# Altium PCB board2.PcbDoc
Units mm, origin at the board's own origin, x right, y up, seen from the top; angles counter-clockwise.
Board outline 120 x 70 mm, 2 copper layers (Top Layer, Bottom Layer); 12 components, 22 nets, 119 pads, 0 vias.
Unrouted connection lines stored in the file: 1.
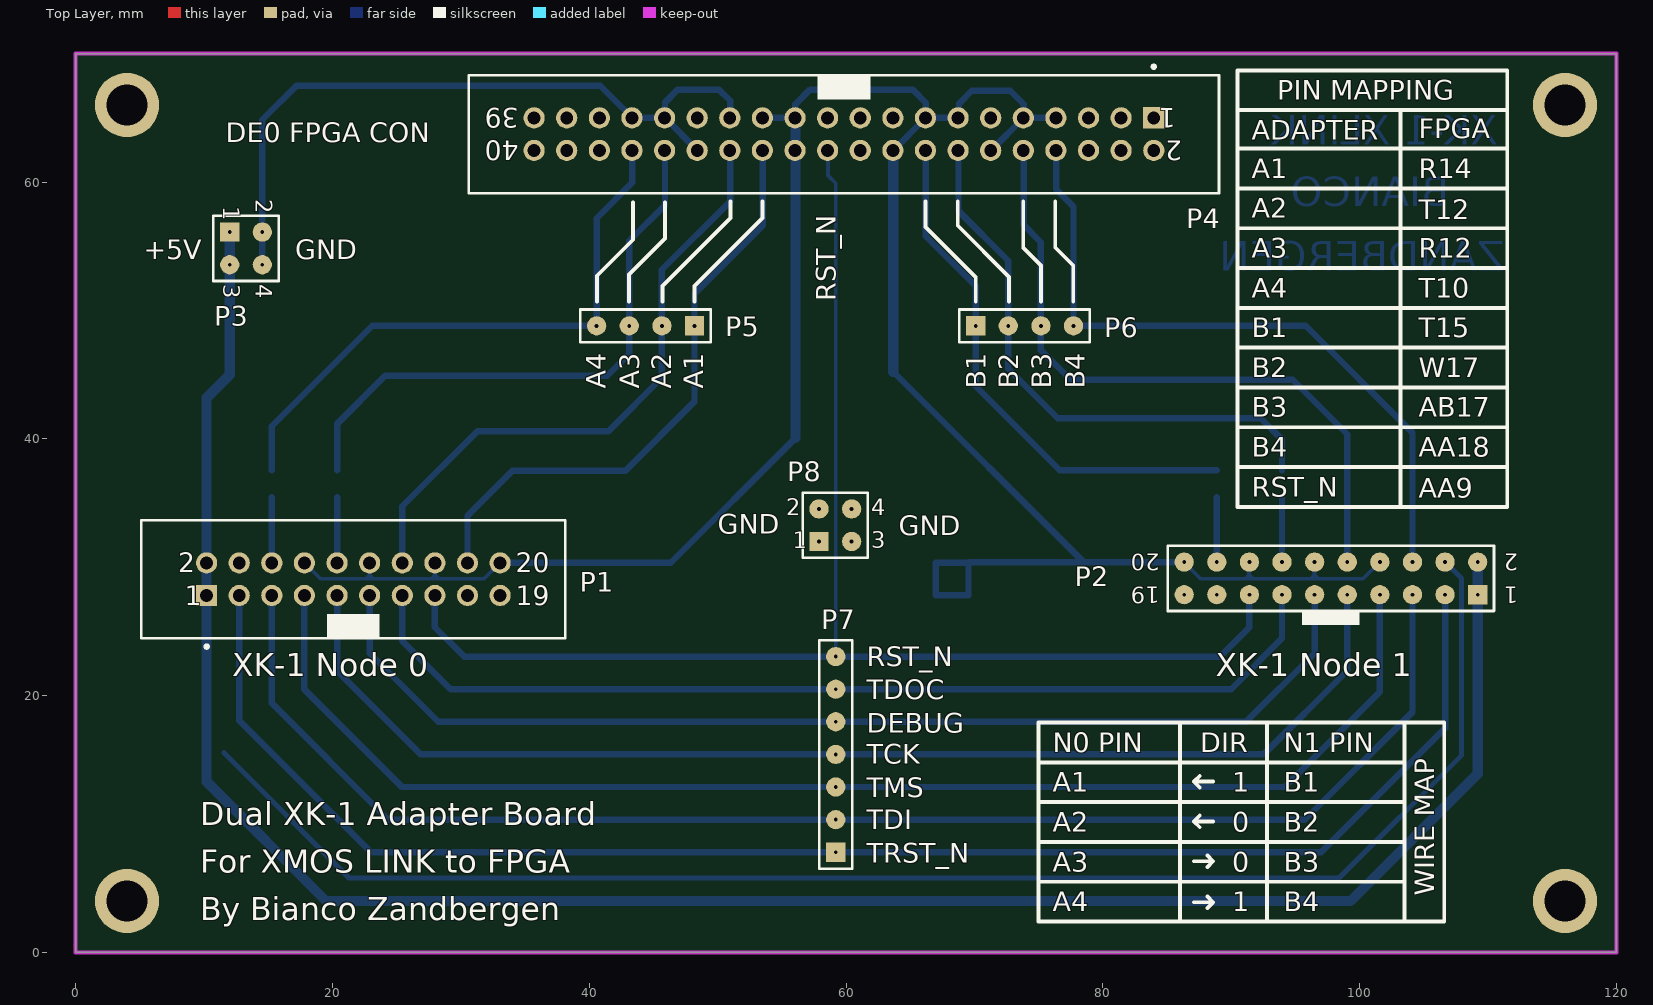
[diagram p0: Top Layer view]
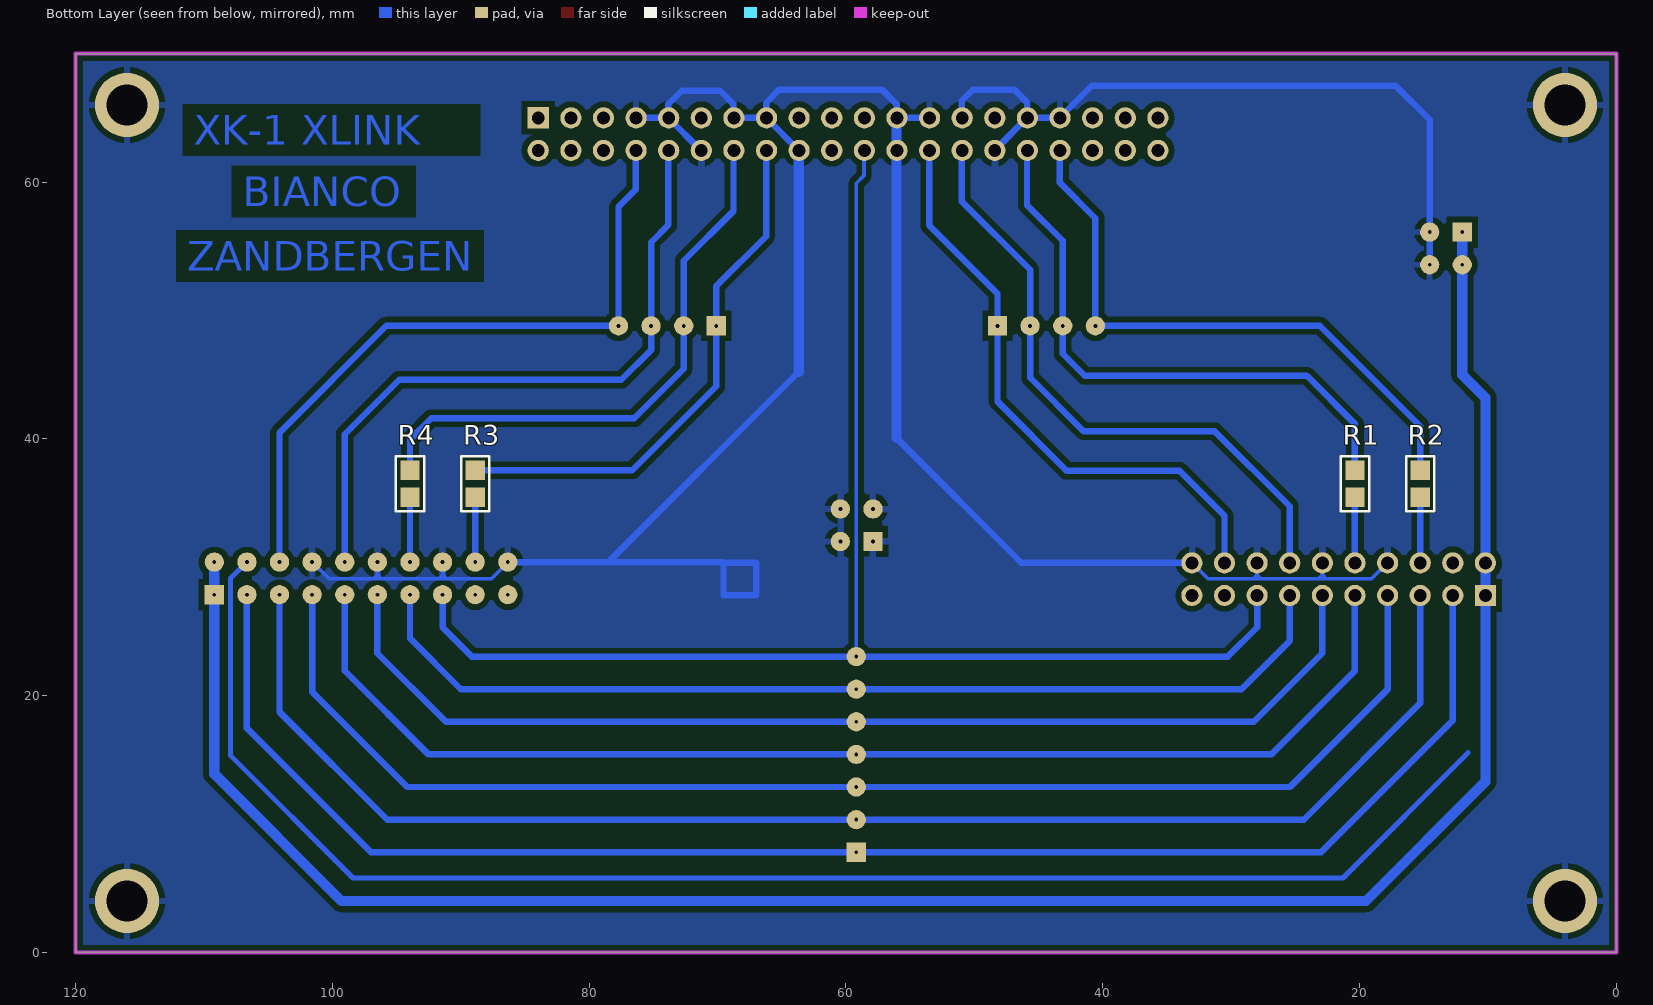
[diagram p1: Bottom Layer view, seen from below]
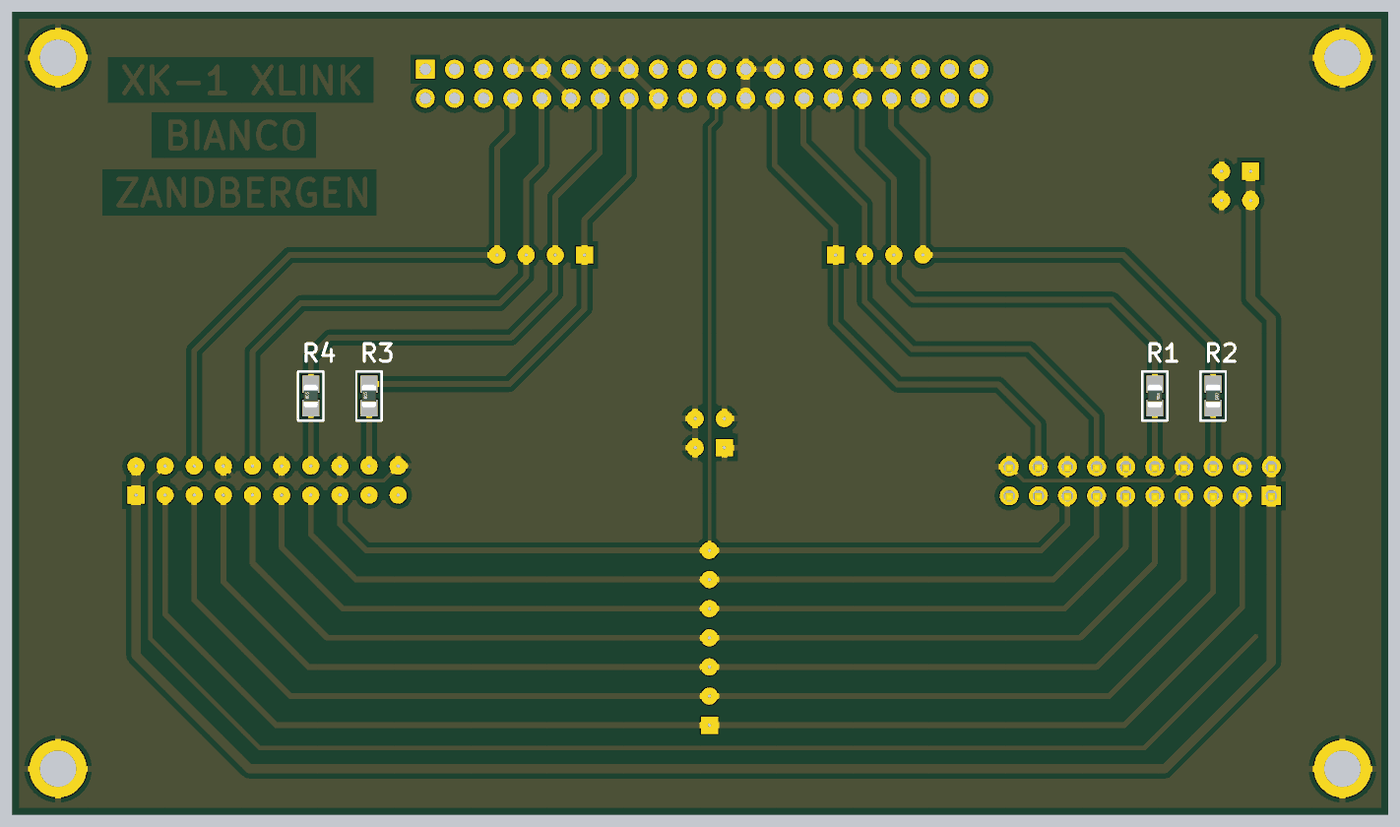
[diagram p2: 3D render of the assembled board from below, using the file's embedded part models]

## Layer stack, top to bottom
Top Layer: signal copper 0.0356
Dielectric: dielectric 0.32, FR-4, Dk 4.8
Bottom Layer: signal copper 0.0356

## Board outline
0,0 120,0 120,70 0,70

## Design rules (kind name [scope] priority, off if disabled: settings)
Clearance PolyClearance [All vs InPolygon] p1: gap=0.45
Clearance [All] p2: gap=0.3
PolygonConnect PolygonConnect_1 [All vs IsNamedPolygon('GND')] p1: connectstyle=Relief reliefconductorwidth=0.5 reliefentries=4 polygonreliefangle="90 Angle"
PolygonConnect [All] p2: connectstyle=Relief reliefconductorwidth=0.254 reliefentries=4 polygonreliefangle="90 Angle"
RoomDefinition board1 [InComponentClass('board1')] p1 off: confinementstyle=ConfineIn formatcopy=TRUE lockcomponents=FALSE outline 121.158,1.524 180.086,1.524 180.086,59.817 121.158,59.817
RoutingVias [All] p1: holewidth=0.8 width=1.6 viastyle="Through Hole" minholewidth=0.711 minwidth=1.27 maxholewidth=0.711 maxwidth=1.27
SilkscreenOverComponentPads [All] p1: minsilkscreentomaskgap=0.254
SolderMaskExpansion [All] p1: expansion=0.102
Width [All] p1: maxlimit=0.8 minlimit=0.3 preferedwidth=0.5 toplayer_maxwidth=0.5 minimp=50.000000 maximp=50.000000 favimp=50.000000
27 further rules are at their usual default settings.

## Components (designator, comment, footprint, x,y, rotation, side; value= is the part's Value field where it differs from the comment)
P1 "Header 10X2" IDC2.54-V20D 21.63,29.07 r0 top
P2 "Header 10X2" HDR2X10_MIRROR 109.2,30.4 r180 top
P3 "Header 2X2" HDR2X2 12,56.1 r270 top
P4 "Header 20X2" IDC2.54-V40D 59.84,63.73 r180 top
P5 "Header 4" HDR1X4 48.2,48.8 r180 top
P6 "Header 4" HDR1X4 70.1,48.8 r0 top
P7 "Header 7" HDR1X7 59.2,7.8 r90 top
P8 "Header 2X2" HDR2X2 57.9,32 r0 top
R1 "Res1" 2012[0805]_RES 20.36,36.5 r270 bottom
R2 "Res1" 2012[0805]_RES 15.28,36.5 r270 bottom
R3 "Res1" 2012[0805]_RES 88.88,36.5 r90 bottom
R4 "Res1" 2012[0805]_RES 93.96,36.5 r90 bottom

## Footprints (in the part's own frame and the unit in brackets; to place one, negate y for a bottom-side part, rotate by r counter-clockwise, add the part's x,y. Pads: shape width x height; smd on the part's side, far side on the other; paste and mask are expansions set on the pad)
2012[0805]_RES [mm] "Chip Resistor / Capacitor; Body 2.0 x 1.3 mm (LxW typ) Handsoldering optimized"
  rect 1.5x1.5 smd: 1(-1.05,0) 2(1.05,0)
  silkscreen extent -2.15,-1.1 2.15,1.1, body extent -1,-0.63 1,0.62, height 0.78
HDR1X4 [mm] "Connector; Header; 4 Position"
  rect 1.5x1.5 hole 0.3: 1(0,0)
  round 1.5 hole 0.3: 2(2.54,0) 3(5.08,0) 4(7.62,0)
  silkscreen extent -1.27,-1.27 8.89,1.27
HDR1X7 [mm] "Connector; Header; 7 Position"
  rect 1.5x1.5 hole 0.3: 1(0,0)
  round 1.5 hole 0.3: 2(2.54,0) 3(5.08,0) 4(7.62,0) 5(10.16,0) 6(12.7,0) 7(15.24,0)
  silkscreen extent -1.27,-1.27 16.51,1.27
HDR2X2 [mm] "Connector; Header; 2x2 Position"
  rect 1.5x1.5 hole 0.3: 1(0,0)
  round 1.5 hole 0.3: 2(0,2.54) 3(2.54,0) 4(2.54,2.54)
  silkscreen extent -1.27,-1.27 3.81,3.81
HDR2X10_MIRROR [mm]
  rect 1.5x1.5 hole 0.3: 1(0,2.54)
  round 1.5 hole 0.3: 2(0,0) 3(2.54,2.54) 4(2.54,0) 5(5.08,2.54) 6(5.08,0) 7(7.62,2.54) 8(7.62,0) 9(10.16,2.54) 10(10.16,0) 11(12.7,2.54) 12(12.7,0) 13(15.24,2.54) 14(15.24,0) 15(17.78,2.54) 16(17.78,0) 17(20.32,2.54) 18(20.32,0) 19(22.86,2.54) 20(22.86,0)
  silkscreen extent -1.27,-1.27 24.13,3.81
IDC2.54-V20D [mm] "Connector; IDC, Low Profile Male Header, Thru-Hole; 20 Position; Vertical; Pitch 2.54 mm; Body 33.02 x 9.2 x 9.45 mm (LxWxH)"
  rect 1.65x1.65 hole 1: 1(-11.43,-1.27)
  round 1.65 hole 1: 2(-11.43,1.27) 3(-8.89,-1.27) 4(-8.89,1.27) 5(-6.35,-1.27) 6(-6.35,1.27) 7(-3.81,-1.27) 8(-3.81,1.27) 9(-1.27,-1.27) 10(-1.27,1.27) 11(1.27,-1.27) 12(1.27,1.27) 13(3.81,-1.27) 14(3.81,1.27) 15(6.35,-1.27) 16(6.35,1.27) 17(8.89,-1.27) 18(8.89,1.27) 19(11.43,-1.27) 20(11.43,1.27)
  silkscreen extent -16.51,-5.37 16.51,4.6, body extent -16.52,-4.75 16.5,4.72, height 9.27
IDC2.54-V40D [mm] "Connector; IDC, Low Profile Male Header, Thru-Hole; 40 Position; Vertical; Pitch 2.54 mm; Body 58.42 x 9.2 x 9.45 mm (LxWxH)"
  rect 1.65x1.65 hole 1: 1(-24.13,-1.27)
  round 1.65 hole 1: 2(-24.13,1.27) 3(-21.59,-1.27) 4(-21.59,1.27) 5(-19.05,-1.27) 6(-19.05,1.27) 7(-16.51,-1.27) 8(-16.51,1.27) 9(-13.97,-1.27) 10(-13.97,1.27) 11(-11.43,-1.27) 12(-11.43,1.27) 13(-8.89,-1.27) 14(-8.89,1.27) 15(-6.35,-1.27) 16(-6.35,1.27) 17(-3.81,-1.27) 18(-3.81,1.27) 19(-1.27,-1.27) 20(-1.27,1.27) 21(1.27,-1.27) 22(1.27,1.27) 23(3.81,-1.27) 24(3.81,1.27) 25(6.35,-1.27) 26(6.35,1.27) 27(8.89,-1.27) 28(8.89,1.27) 29(11.43,-1.27) 30(11.43,1.27) 31(13.97,-1.27) 32(13.97,1.27) 33(16.51,-1.27) 34(16.51,1.27) 35(19.05,-1.27) 36(19.05,1.27) 37(21.59,-1.27) 38(21.59,1.27) 39(24.13,-1.27) 40(24.13,1.27)
  silkscreen extent -29.21,-5.37 29.21,4.6, body extent -29.21,-4.6 29.21,4.6, height 9.45

## Part data
P1 P2: "Header, 10-Pin, Dual row"
P3 P8: "Header, 2-Pin, Dual row"
P4: "Header, 20-Pin, Dual row"
P5 P6: "Header, 4-Pin"
P7: "Header, 7-Pin"
R1 R2 R3 R4: "Resistor"

## Free pads (board coordinates)
  round 5 hole 3.175: 0(4,4) 1(4,66) 2(116,66) 3(116,4)
  round 3.175 on Top Overlay: 0(4,4) 1(116,4) 2(116,66) 3(4,66)

## Nets (pads, with @x,y where several pads share a name; then routed paths per layer and width w, separated by ;. In a path a pad name is that pad's centre, name@x,y a point inside that pad or via, vN(x,y) a via of type N, cw(c..) or ccw(c..) an arc to the next point about the centre after c; other vN are vias at no path point)
5V: P1.1 P1.2 P2.1 P2.2 P3.1 P3.3 | length 167
  Bottom Layer w0.8: P3.1 P3.3 12,45 10.2,43.2 P1.2 P1.1 10.2,13.3 19.5,4 99.3,4 109.2,13.9 P2.1 P2.2
DEBUG: P1.11 P2.11 P7.5 | length 87.1
  Bottom Layer w0.5: P1.11 22.9,23.3 28.24,17.96 P7.5 91.16,17.96 96.5,23.3 P2.11
GND: P1.8 P1.12 P1.16 P1.20 P2.8 P2.12 P2.16 P2.20 P3.2 P3.4 P4.7 P4.9 P4.12 P4.13 P4.15 P4.18 P4.23 P4.24 P4.25 P4.27 P4.30 P4.31 P4.33 P8.1 P8.2 P8.3 P8.4 pad.0@4,4 pad.1@4,66 pad.2@116,66 pad.3@116,4 | length 251
  Bottom Layer w0.3: P1.8 19.06,29.1 22.6,29.1 ; P1.12 22.9,29.4 ; P1.16@28,30.32 28,29.4 ; P1.20 31.82,29.1 28.3,29.1 ; P2.20@86.34,30.36 87.6,29.1 91.1,29.1 ; P2.16@91.4,30.38 91.4,29.4 ; P2.12 96.5,29.4 ; P2.8 100.28,29.1 96.8,29.1 ; 22.6,29.1 22.9,29.1 ; 22.6,29.1 22.9,29.4 ; 22.9,29.1 22.9,29.4 ; 22.9,29.1 23.2,29.1 ; 22.9,29.4 23.2,29.1 ; 23.2,29.1 27.7,29.1 ; 27.7,29.1 28,29.1 ; 27.7,29.1 28,29.4 ; 28,29.1 28,29.4 ; 28,29.1 28.3,29.1 ; 28,29.4 28.3,29.1 ; 91.1,29.1 91.4,29.1 ; 91.1,29.1 91.4,29.4 ; 91.4,29.1 91.4,29.4 ; 91.4,29.1 91.7,29.1 ; 91.4,29.4 91.7,29.1 ; 91.7,29.1 96.2,29.1 ; 96.2,29.1 96.5,29.1 ; 96.2,29.1 96.5,29.4 ; 96.5,29.1 96.8,29.1 ; 96.5,29.1 96.5,29.4 ; 96.5,29.4 96.8,29.1
  Bottom Layer w0.5: P3.4 P3.2 14.54,64.84 17.2,67.5 40.86,67.5 43.36,65 P4.31@45.9,65 ; P1.20 46.34,30.34 56.06,40.06 ; P4.30@48.44,62.46 P4.31@45.9,65 ; P4.27@50.98,65 50.98,66.32 50.1,67.2 46.9,67.2 45.9,66.2 P4.31@45.9,65 ; P4.25@53.52,65 56.06,65 56.06,66.06 57.2,67.2 65.2,67.2 66.22,66.18 P4.15@66.22,65 ; 63.68,45.22 78.5,30.4 ; P4.18@63.68,62.46 P4.15@66.22,65 ; 67,30.34 67,27.8 69.54,27.8 69.54,30.34 ; 67.06,30.34 69.54,30.34 ; P4.12@71.3,62.46 P4.9@73.84,65 ; P4.7@76.38,65 P4.9@73.84,65 ; P2.20@86.34,30.36 P2.20 78.5,30.4 ; P4.15@66.22,65 68.76,65 68.8,65.04 68.8,66.1 69.8,67.1 72.8,67.1 73.84,66.06 P4.9@73.84,65 ; 69.54,30.34 69.6,30.4 78.5,30.4
  Bottom Layer w0.8: 56.06,40.06 56.06,62.46 P4.23@56.06,65 ; 63.68,45.22 P4.18@63.68,62.46
NetP1_6: P1.6 R2.2 | length 5.1
  Bottom Layer w0.5: P1.6 R2.2
NetP1_10: P1.10 R1.2 | length 5.1
  Bottom Layer w0.5: P1.10 R1.2
NetP2_14: P2.14 R4.1 | length 5.1
  Bottom Layer w0.5: P2.14 R4.1
NetP2_18: P2.18 R3.1 | length 5.1
  Bottom Layer w0.5: P2.18 R3.1
RST_N: P1.15 P2.15 P4.22 P7.7 | length 110
  Bottom Layer w0.3: P4.22@58.6,62.46 58.6,60.5 59.2,59.9 P7.7
  Bottom Layer w0.5: P1.15 27.98,25.32 30.26,23.04 P7.7 89.14,23.04 91.42,25.32 P2.15
SENSE: P1.4 P2.4 | length 120
  Bottom Layer w0.4: 11.55,15.55 21.3,5.8 98.4,5.8 107.95,15.35 107.95,29.11 P2.4
TCK: P1.9 P2.9 P7.4 | length 95.9
  Bottom Layer w0.5: P1.9 20.36,21.94 26.88,15.42 P7.4 92.52,15.42 99.04,21.94 P2.9
TDI: P1.5 P2.5 P7.2 | length 113.6
  Bottom Layer w0.5: P1.5 15.28,19.42 24.36,10.34 P7.2 95.74,10.34 104.12,18.72 P2.5
TDOC: P1.13 P2.13 P7.6 | length 78.7
  Bottom Layer w0.5: P1.13 25.44,24.26 29.2,20.5 P7.6 90,20.5 93.96,24.46 P2.13
TMS: P1.7 P2.7 P7.3 | length 104.9
  Bottom Layer w0.5: P1.7 17.82,20.48 25.42,12.88 P7.3 94.18,12.88 101.58,20.28 P2.7
TRST_N: P1.3 P2.3 P7.1 | length 122.3
  Bottom Layer w0.5: P1.3 12.74,18.06 23,7.8 P7.1 97,7.8 106.66,17.46 P2.3
XL_A_1: P1.18 P4.26 P5.1 | length 46.8
  Bottom Layer w0.5: P1.18 30.52,34.02 34,37.5 42.8,37.5 48.2,42.9 P5.1 48.2,51.3 53.52,56.62 P4.26@53.52,62.46
XL_A_2: P1.14 P4.28 P5.2 | length 48.7
  Bottom Layer w0.5: P1.14 25.44,34.74 31.3,40.6 41.5,40.6 45.66,44.76 P5.2 45.66,53.16 51,58.5 51,62.44 P4.28@50.98,62.46
XL_A_3: P4.32 P5.3 R1.1 | length 45.6
  Bottom Layer w0.5: R1.1 20.36,41.16 24.1,44.9 41.4,44.9 43.12,46.62 P5.3 43.12,55.42 45.9,58.2 P4.32@45.9,62.46
XL_A_4: P4.34 P5.4 R2.1 | length 46.8
  Bottom Layer w0.5: R2.1 15.28,40.98 23.1,48.8 P5.4 40.58,57.18 43.36,59.96 P4.34@43.36,62.46
XL_B_1: P4.16 P6.1 R3.2 | length 41.5
  Bottom Layer w0.5: P4.16@66.22,62.46 66.22,55.78 70.1,51.9 P6.1 70.1,44.1 76.65,37.55 R3.2
XL_B_2: P4.14 P6.2 R4.2 | length 44.6
  Bottom Layer w0.5: P4.14@68.76,62.46 68.76,57.74 72.64,53.86 P6.2 72.64,45.46 76.5,41.6 92.3,41.6 93.96,39.94 R4.2
XL_B_3: P2.10 P4.10 P6.3 | length 52.6
  Bottom Layer w0.5: P4.10@73.84,62.46 73.84,56.66 75.18,55.32 P6.3 75.18,46.92 77.5,44.6 94.8,44.6 99.04,40.36 P2.10
XL_B_4: P2.6 P4.8 P6.4 | length 54.1
  Bottom Layer w0.5: P4.8@76.38,62.46 76.38,59.42 77.72,58.08 P6.4 95.8,48.8 104.12,40.48 P2.6
pads on no net: P1.17 P1.19 P2.17 P2.19 P4.1 P4.2 P4.3 P4.4 P4.5 P4.6 P4.11 P4.17 P4.19 P4.20 P4.21 P4.29 P4.35 P4.36 P4.37 P4.38 P4.39 P4.40

## Polygon pours and split planes (outlines as drawn)
GND on Bottom Layer "GND" (solid, remove dead copper, pour order 2): 0,0 0,70 120,70 120,0

## Keep-outs
Keep-Out Layer:
  the board outline again, w0.3

## Other copper
Bottom Layer:
  text "XK-1 XLINK" at 110.8,62.9 h2.3
  text "BIANCO" at 107,58.1 h2.3
  text "ZANDBERGEN" at 111.3,53.1 h2.3

## Silkscreen, mask and mechanical layers (free items; w line width, h text height)
Top Overlay:
  rectangle: 95.5,25.5 100,26.59
  lines w0.3: 40.6,50.7 40.6,52.7 43.4,55.5 43.4,58.4 ; 43.1,50.7 43.1,52.8 45.9,55.6 45.9,58.4 ; 45.7,50.7 45.7,51.9 51,57.2 51,58.5 ; 48.2,50.7 48.2,51.9 53.5,57.2 53.5,58.5 ; 66.2,58.5 66.2,56.5 70.1,52.6 70.1,50.7 ; 68.7,58.5 68.7,56.6 72.7,52.6 72.7,50.7 ; 73.8,58.5 73.8,54.9 75.2,53.5 75.2,50.7 ; 75,5.5 103.5,5.5 ; 75,8.6 103.5,8.6 ; 75,11.7 103.5,11.7 ; 75,14.8 103.5,14.8 ; 76.3,58.5 76.3,54.9 77.7,53.5 77.7,50.7 ; 86,2.4 86,17.9 ; 87.1,3.9 88.6,3.9 ; 87.1,7.1 88.6,7.1 ; 87.55,9.75 87.1,10.2 ; 87.55,10.65 87.1,10.2 ; 87.55,12.85 87.1,13.3 ; 87.55,13.75 87.1,13.3 ; 88.15,3.45 88.6,3.9 ; 88.15,4.35 88.6,3.9 ; 88.15,6.65 88.6,7.1 ; 88.15,7.55 88.6,7.1 ; 88.6,10.2 87.1,10.2 ; 88.6,13.3 87.1,13.3 ; 90.5,37.8 111.5,37.8 ; 90.5,40.9 111.5,40.9 ; 90.5,44 111.5,44 ; 90.5,47.1 111.5,47.1 ; 90.5,50.2 111.5,50.2 ; 90.5,53.3 111.5,53.3 ; 90.5,56.4 111.5,56.4 ; 90.5,59.5 111.5,59.5 ; 90.5,62.6 111.4,62.6 ; 92.8,2.5 92.8,17.9 ; 103.2,34.7 103.2,65.6 ; 103.4,17.9 106.6,17.9 106.6,2.4 103.5,2.4 ; 87.1,13.3 87.1,13.3 ; 88.6,3.9 88.6,3.9 ; 88.6,7.1 88.6,7.1 ; 90.5,65.6 90.5,34.7 111.5,34.7 111.5,65.6 ; 90.5,65.6 111.5,65.6 ; 90.5,65.6 90.5,68.7 111.5,68.7 111.5,65.6 ; 103.5,2.4 75,2.4 75,17.9 103.5,17.9 103.5,2.4
  text "PIN MAPPING" at 93.6,66.4 h1.52
  text "FPGA" at 104.6,63.4 h1.52
  text "ADAPTER" at 91.6,63.3 h1.52
  text "DE0 FPGA CON" at 11.7,63.1 h1.52
  text "A1" at 91.6,60.3 h1.52
  text "R14" at 104.6,60.3 h1.52
  text "A2" at 91.6,57.2 h1.52
  text "T12" at 104.6,57.1 h1.52
  text "A3" at 91.6,54.1 h1.52
  text "R12" at 104.6,54.1 h1.52
  text "+5V" at 5.3,54 h1.52
  text "GND" at 17.1,54 h1.52
  text "A4" at 91.6,51 h1.52
  text "T10" at 104.6,51 h1.52
  text "RST_N" at 59.2,50.7 h1.52 r90
  text "B1" at 91.6,47.9 h1.52
  text "T15" at 104.6,47.9 h1.52
  text "B2" at 91.6,44.8 h1.52
  text "W17" at 104.6,44.8 h1.52
  text "A4" at 41.3,43.9 h1.52 r90
  text "A3" at 43.9,43.9 h1.52 r90
  text "A2" at 46.4,43.9 h1.52 r90
  text "A1" at 48.9,43.9 h1.52 r90
  text "B1" at 70.9,43.9 h1.52 r90
  text "B2" at 73.4,43.9 h1.52 r90
  text "B3" at 76,43.9 h1.52 r90
  text "B4" at 78.6,43.9 h1.52 r90
  text "B3" at 91.6,41.7 h1.52
  text "AB17" at 104.6,41.7 h1.52
  text "B4" at 91.6,38.6 h1.52
  text "AA18" at 104.6,38.6 h1.52
  text "RST_N" at 91.6,35.5 h1.52
  text "AA9" at 104.6,35.4 h1.52
  text "GND" at 50,32.6 h1.52
  text "GND" at 64.1,32.5 h1.52
  text "RST_N" at 61.6,22.3 h1.52
  text "XK-1 Node 0" at 12.2,21.5 h1.8
  text "XK-1 Node 1" at 88.8,21.5 h1.8
  text "TDOC" at 61.6,19.7 h1.52
  text "DEBUG" at 61.6,17.1 h1.52
  text "N0 PIN" at 76.1,15.6 h1.52
  text "DIR" at 87.6,15.6 h1.52
  text "N1 PIN" at 94.1,15.6 h1.52
  text "TCK" at 61.6,14.7 h1.52
  text "A1" at 76.1,12.5 h1.52
  text "1" at 90.1,12.5 h1.52
  text "B1" at 94.1,12.5 h1.52
  text "TMS" at 61.6,12.1 h1.52
  text "Dual XK-1 Adapter Board" at 9.7,9.9 h1.8
  text "TDI" at 61.6,9.6 h1.52
  text "A2" at 76.1,9.4 h1.52
  text "0" at 90.1,9.4 h1.52
  text "B2" at 94.1,9.4 h1.52
  text "TRST_N" at 61.6,7 h1.52
  text "A3" at 76.1,6.3 h1.52
  text "0" at 90.1,6.3 h1.52
  text "B3" at 94.1,6.3 h1.52
  text "For XMOS LINK to FPGA" at 9.7,6.2 h1.8
  text "WIRE MAP" at 105.8,4.4 h1.52 r90
  text "A4" at 76.1,3.2 h1.52
  text "1" at 90.1,3.2 h1.52
  text "B4" at 94.1,3.2 h1.52
  text "By Bianco Zandbergen" at 9.7,2.5 h1.8
Drill Drawing:
  text ".LEGEND" at 125.08,5.08 h1.52
  text "Drill Drawing." at 125.08,2.54 h1.52

## Dimensions
0,0 to 120,0 on Mechanical 1
0,0 to 0,70 on Mechanical 1

## Text inside footprints (layer, text, board x,y; h text height)
P1: Top Overlay "2" at 8,29.59 h1.5; Top Overlay "1" at 8.5,27.05 h1.5; Top Overlay "20" at 34.26,29.59 h1.5; Top Overlay "19" at 34.26,27.05 h1.5
P2: Top Overlay "20" at 84.435,31.035 h1.27 r180; Top Overlay "19" at 84.435,28.495 h1.27 r180; Top Overlay "1" at 112.375,28.495 h1.27 r180; Top Overlay "2" at 112.375,31.035 h1.27 r180
P3: Top Overlay "3" at 11.492,52.036 h1.27 r270; Top Overlay "4" at 14.032,52.036 h1.27 r270; Top Overlay "2" at 14.032,58.64 h1.27 r270; Top Overlay "1" at 11.492,58.132 h1.27 r270
P4: Top Overlay "2" at 86.17,63.21 h1.5 r180; Top Overlay "1" at 85.67,65.75 h1.5 r180; Top Overlay "40" at 34.51,63.21 h1.5 r180; Top Overlay "39" at 34.51,65.75 h1.5 r180
P8: Top Overlay "3" at 61.964,31.492 h1.27; Top Overlay "4" at 61.964,34.032 h1.27; Top Overlay "2" at 55.36,34.032 h1.27; Top Overlay "1" at 55.868,31.492 h1.27